# Altium PCB Nutap_Adpt.PcbDoc
Units mm, origin at the board's own origin, x right, y up, seen from the top; angles counter-clockwise.
Board outline 152.4 x 101.6 mm, 2 copper layers (Top Layer, Bottom Layer); 15 components, 7 nets, 41 pads, 1 vias.
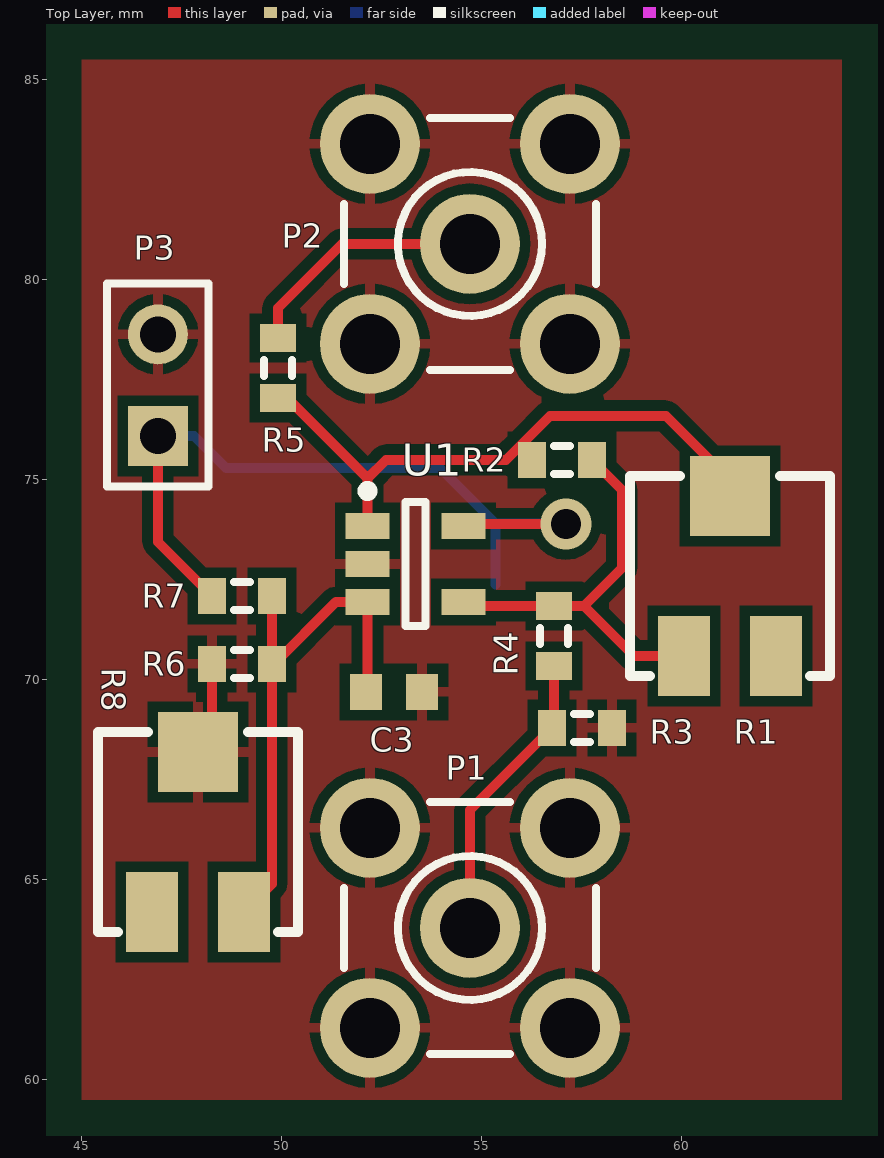
[diagram p0: Top Layer view]
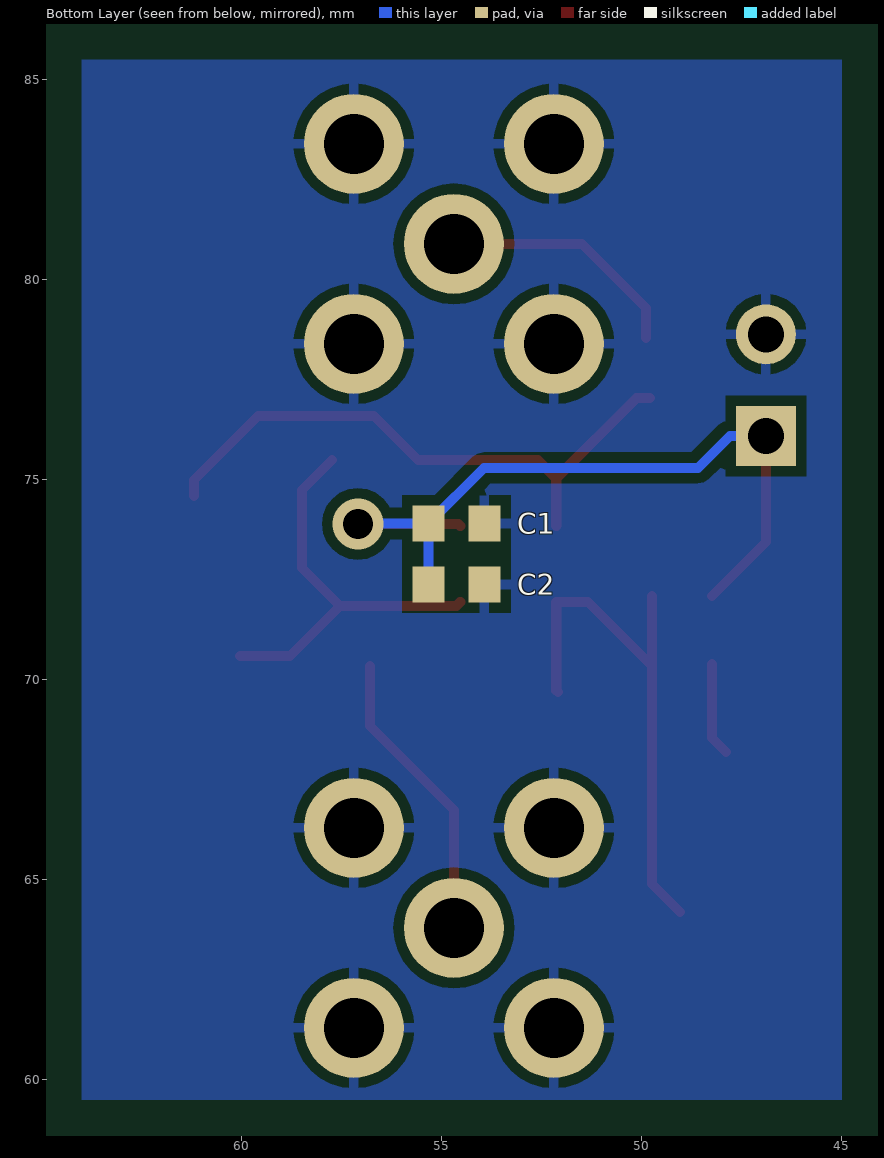
[diagram p1: Bottom Layer view, seen from below]

## Layer stack, top to bottom
Top Layer: signal copper 0.0356
Dielectric: dielectric 0.32, FR-4, Dk 4.8
Bottom Layer: signal copper 0.0356

## Board outline
25.4,25.4 177.8,25.4 177.8,127 25.4,127

## Design rules (kind name [scope] priority, off if disabled: settings)
Clearance [All] p1: gap=0.254
MinimumSolderMaskSliver MinimumSolderMaskSliver_1 [InComponent('U1')] p1: minsoldermaskwidth=0.05
MinimumSolderMaskSliver [All] p2: minsoldermaskwidth=0.254
PolygonConnect [All] p1: connectstyle=Relief reliefconductorwidth=0.254 reliefentries=4 polygonreliefangle="90 Angle"
RoutingVias [All] p1: holewidth=0.711 width=1.27 viastyle="Through Hole" minholewidth=0.711 minwidth=1.27 maxholewidth=0.711 maxwidth=1.27
SilkscreenOverComponentPads SilkscreenOverComponentPads_1 [All vs (HasFootprint('J1-0603')   OR HasFootprint('POT4MM-2'))] p1: minsilkscreentomaskgap=0.02
SilkscreenOverComponentPads [All] p2: minsilkscreentomaskgap=0.254
SolderMaskExpansion SolderMaskExpansion_1 [InComponent('U1')] p1: expansion=0.05
SolderMaskExpansion [All] p2: expansion=0.102
Width [All] p1: maxlimit=0.254 minlimit=0.254 preferedwidth=0.254
26 further rules are at their usual default settings.

## Classes and differential pairs
component class Nutaq_Adaptor: C1 C2 C3 P2 P3 R1 R2 R3 R4 R5 R6 R7 R8 U1

## Components (designator, comment, footprint, x,y, rotation, side; value= is the part's Value field where it differs from the comment)
C1 "Cap" 1608[0603] 54.639,73.911 r180 bottom
C2 "Cap Pol" 1608[0603] 54.639,72.387 r180 bottom
C3 "Cap" 1608[0603] 52.8,69.7 r0 top
P1 "SMA" SMB_V-RJ45 54.7,63.8 r0 top
P2 "SMA" SMB_V-RJ45 54.7,80.9 r0 top
P3 "Header 2" HDR1X2 46.9,76.1 r90 top
R1 "1K" POT4MM-2 61.2,72.6 r90 top
R2 "Res3" J1-0603 57,75.5 r180 top
R3 "Res3" J1-0603 57.5,68.8 r0 top
R4 "Res3" J1-0603 56.8,71.1 r90 top
R5 "Res3" J1-0603 49.9,77.8 r90 top
R6 "Res3" J1-0603 49,70.4 r0 top
R7 "Res3" J1-0603 49,72.1 r0 top
R8 "1K" POT4MM-2 47.9,66.2 r90 top
U1 "OPA830" SOT23-5_N 53.34,72.898 r0 top

## Footprints (in the part's own frame and the unit in brackets; to place one, negate y for a bottom-side part, rotate by r counter-clockwise, add the part's x,y. Pads: shape width x height; smd on the part's side, far side on the other; paste and mask are expansions set on the pad)
1608[0603] [mm] "Chip Capacitor, Body 1.6x0.8mm, IPC High Density"
  rect 0.8x0.9 smd: 1(-0.7,0) 2(0.7,0)
  body extent -0.87,-0.48 0.87,0.48, height 1.3
HDR1X2 [mm] "Connector; Header; 2 Position"
  rect 1.5x1.5 hole 0.9: 1(0,0)
  round 1.5 hole 0.9: 2(2.54,0)
  silkscreen extent -1.27,-1.27 3.81,1.27
J1-0603 [mm] "Chip Resistor, Body 1.6x0.8mm, IPC High Density"
  rect 0.7x0.9 smd: 1(-0.75,0) 2(0.75,0)
  silkscreen extent -0.2,-0.35 0.2,0.35, body extent -0.85,-0.48 0.85,0.48, height 0.9
POT4MM-2 [mm] "Square Trimming Potentiometer"
  rect 2x1.3 smd: CCW(-2,-1.15) CW(-2,1.15)
  rect 2x2 smd: W(2,0)
  silkscreen extent -2.5,-2.5 2.5,2.5
SMB_V-RJ45 [mm] "Connector; SMB Straight"
  round 2.5 hole 1.5: 1(0,0) 2(-2.5,-2.5) 2(-2.5,2.5) 2(2.5,-2.5) 2(2.5,2.5)
  silkscreen extent -3.15,-3.15 3.15,3.15
SOT23-5_N [mm] "SOT23, 5-Leads, Body 2.9x1.6mm, Pitch 0.95mm, Lead Span 2.8mm, IPC Medium Density"
  rect 1.1x0.65 smd: 1(-1.2,0.95) 2(-1.2,0) 3(-1.2,-0.95) 4(1.2,-0.95) 5(1.2,0.95)
  silkscreen extent -1.32,-1.55 0.25,1.95, body extent -0.9,-1.55 0.9,1.55, height 1.45

## Part data
C1 C3: library part "Cap Semi", "Capacitor (Semiconductor SIM Model)"
C2: library part "Cap Pol3", "Polarized Capacitor (Surface Mount)"
P1 P2: library part SMB, "SMB Straight Connector"
P3: "Header, 2-Pin"
R1 R8: library part "RPot SM", "Square Trimming Potentiometer"
R2 R3 R4 R5 R6 R7: "Resistor"
U1: library part MAX477EUK-T, "300MHZ High-Speed Op Amp"

## Via types
v1: diameter 1.27, hole 0.75, Top Layer to Bottom Layer, 1 vias

## Nets (pads, with @x,y where several pads share a name; then routed paths per layer and width w, separated by ;. In a path a pad name is that pad's centre, name@x,y a point inside that pad or via, vN(x,y) a via of type N, cw(c..) or ccw(c..) an arc to the next point about the centre after c; other vN are vias at no path point)
+3V: C1.1 C2.1 P3.1 R7.1 U1.5 | length 19.6
  Top Layer w0.254: P3.1 46.9,73.45 R7.1 ; U1.5 54.592,73.9 v1(57.1,73.9)
  Bottom Layer w0.254: P3.1 47.8,76.1 48.6,75.3 53.95,75.3 C1.1 ; C2.1 C1.1 ; v1@56.489,73.911 C1.1 ; v1@56.9,73.5 57.1,73.7 v1(57.1,73.9)
GND: C1.2 C2.2 C3.2 P1.2 P2.2 P3.2 R3.2 R6.1 R8.W U1.2 | length 2.3
  Top Layer w0.254: R8.W 48.25,68.55 R6.1
NetC3_1: C3.1 R6.2 R7.2 R8.CCW U1.3 | length 13.5
  Top Layer w0.254: R8.CCW 49.75,64.9 49.75,70.35 51.348,71.948 U1.3 52.14,69.74 C3.1 ; R6.2 R7.2
NetP1_1: P1.1 R3.1 R4.1 | length 7.4
  Top Layer w0.254: P1.1 54.7,66.75 R3.1 56.8,68.85 R4.1
NetP2_1: P2.1 R5.2 | length 6.2
  Top Layer w0.254: R5.2 49.9,79.3 51.5,80.9 P2.1
NetR1_CW: R1.CW R2.1 R4.2 U1.4 | length 10.4
  Top Layer w0.254: U1.4 54.638,71.85 R4.2 57.55,71.85 ; R2.1 58.5,74.75 58.5,72.8 57.55,71.85 ; R1.CW 58.8,70.6 57.55,71.85
NetR1_W: R1.W R2.2 R5.1 U1.1 | length 15.1
  Top Layer w0.254: R5.1@49.8,77.05 50.13,77.05 52.14,75.04 ; U1.1 52.14,75.04 ; R1.W 61.2,75 59.6,76.6 56.7,76.6 55.6,75.5 52.6,75.5 52.14,75.04
pads on no net: R1.CCW R8.CW

## Polygon pours and split planes (outlines as drawn)
GND on Top Layer "gnd_top" (solid, remove dead copper, pour order 4): 45,59.5 45,85.5 64,85.5 64,59.5
GND on Bottom Layer "gnd_bot" (solid, remove dead copper, pour order 3): 45,59.5 45,85.5 64,85.5 64,59.5